# Altium PCB Molex_Programming_Adapter.PcbDoc
Units mm, origin at the board's own origin, x right, y up, seen from the top; angles counter-clockwise.
Board outline 47.6 x 24.89 mm, 2 copper layers (Top Layer, Bottom Layer); 12 components, 10 nets, 51 pads, 21 vias.
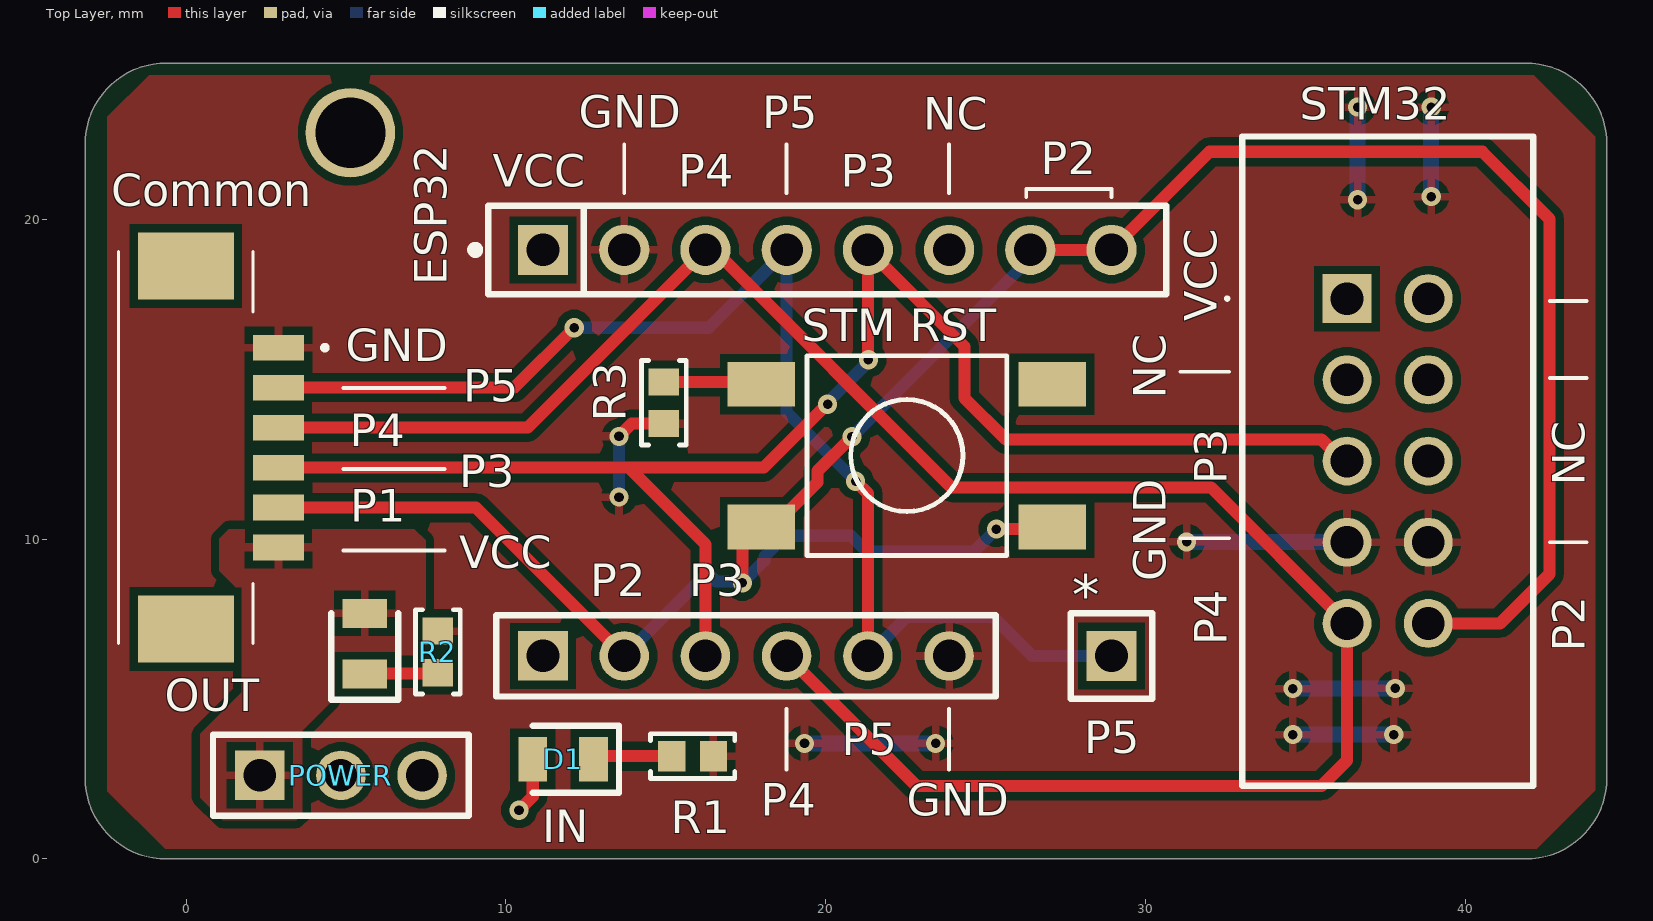
[diagram p0: Top Layer view]
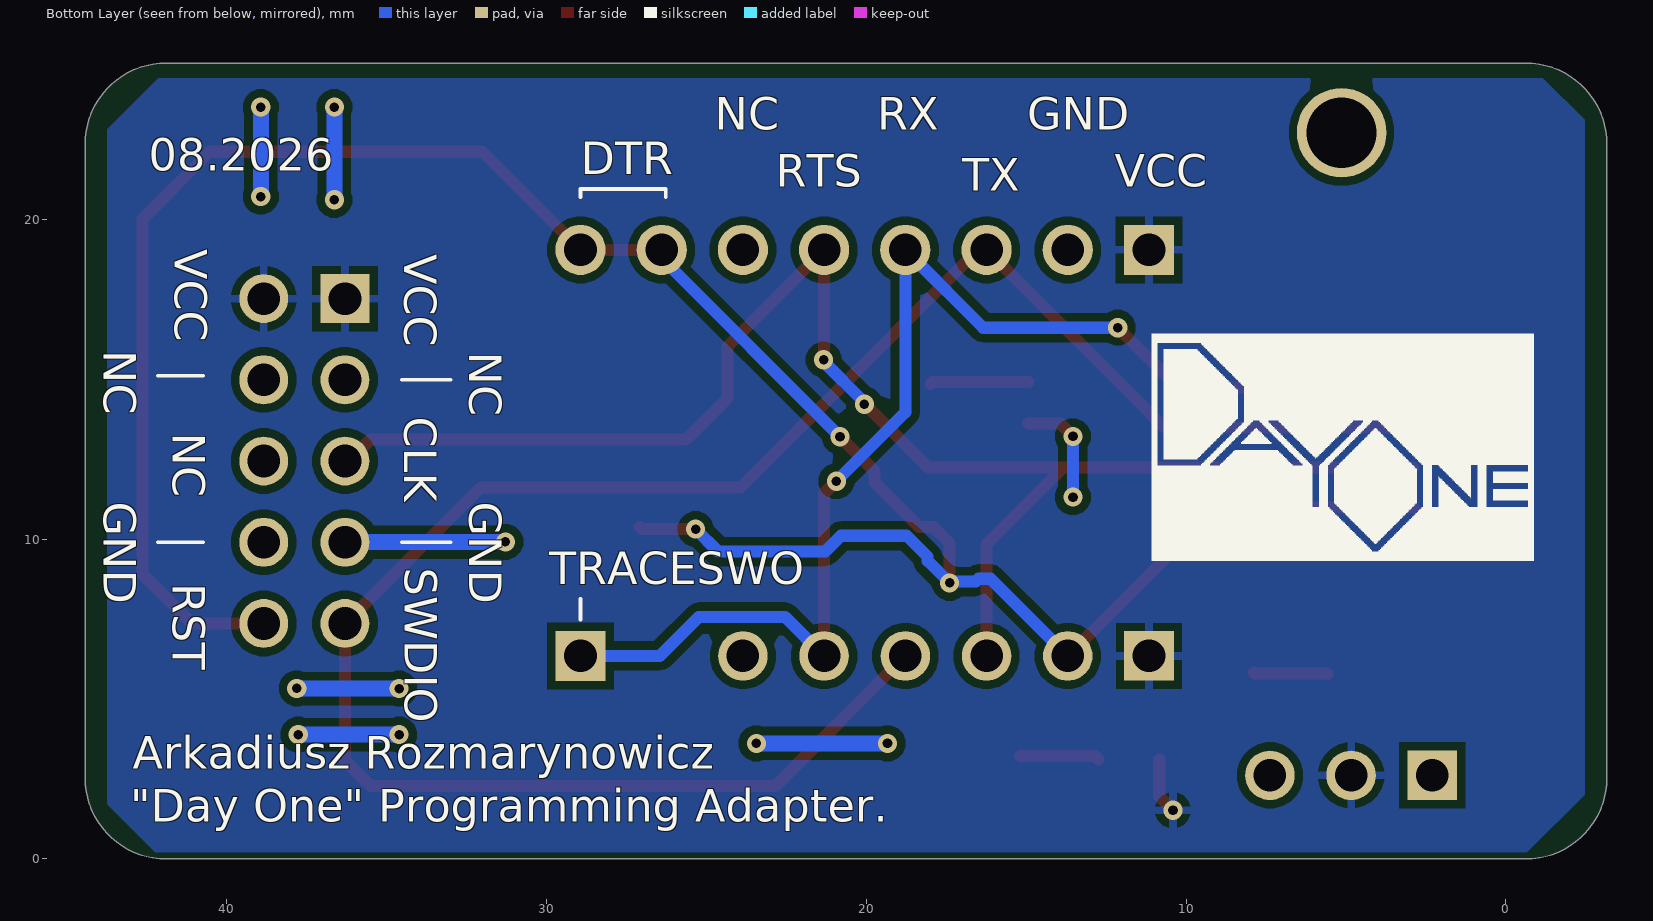
[diagram p1: Bottom Layer view, seen from below]
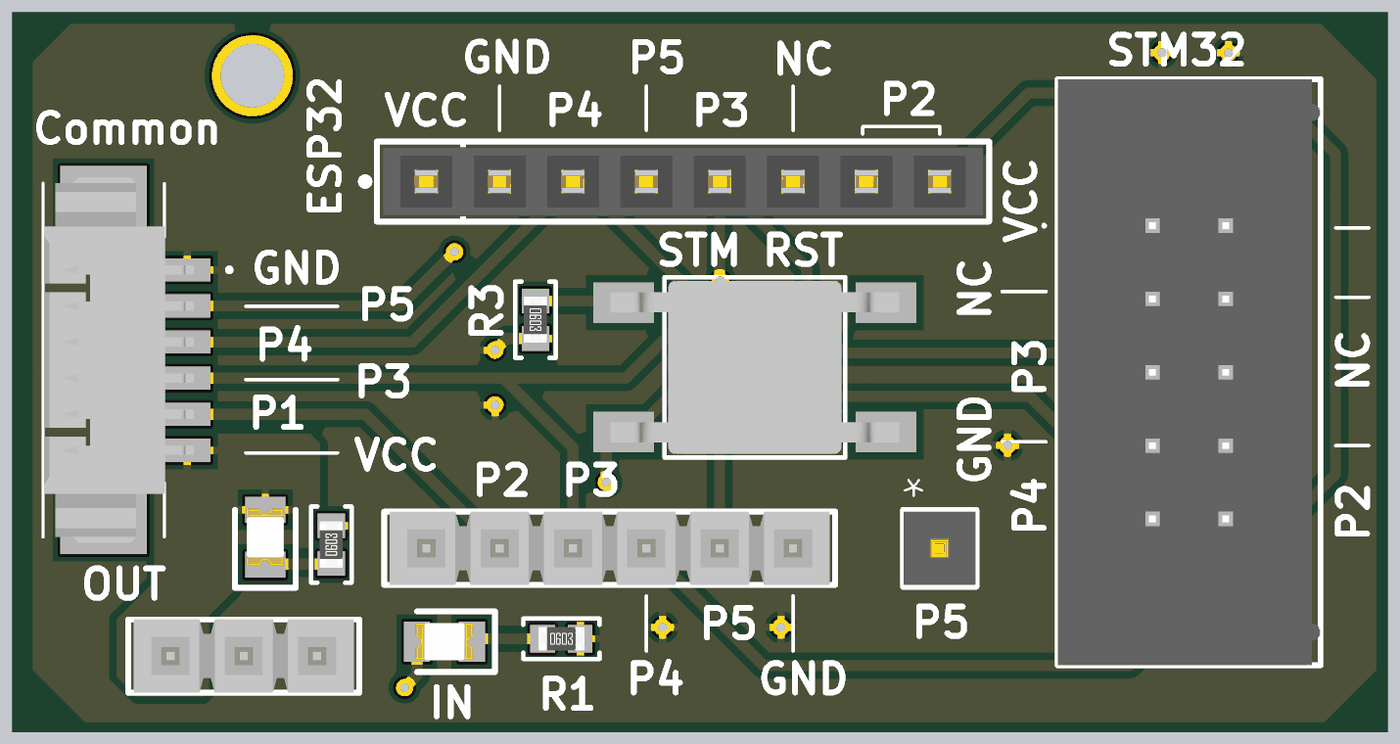
[diagram p2: 3D render of the assembled board from above, using the file's embedded part models]

## Layer stack, top to bottom
Top Solder: solder mask 0.0102, Solder Resist, Dk 3.5
Top Layer: signal copper 0.0356
Dielectric 1: dielectric 0.32, FR-4, Dk 4.8
Bottom Layer: signal copper 0.0356
Bottom Solder: solder mask 0.0102, Solder Resist, Dk 3.5

## Board outline
-0.618,24.892 ccw(c-0.618,22.352) -3.158,22.352 -3.158,2.54 ccw(c-0.618,2.54) -0.618,0 5.842,0 41.898,0 ccw(c41.898,2.54) 44.438,2.54 44.438,22.352 ccw(c41.898,22.352) 41.898,24.892 20.816,24.892

## Design rules (kind name [scope] priority, off if disabled: settings)
Clearance [All] p1: gap=0.254 ignorepadtopadclearanceinfootprint=FALSE
PolygonConnect [All] p1: connectstyle=Relief reliefconductorwidth=0.254 reliefentries=4 polygonreliefangle="90 Angle" airgapwidth=0.254
RoutingVias [All] p1: holewidth=0.3 width=0.6 viastyle="Through Hole" minholewidth=0.2 minwidth=0.45 maxholewidth=0.3 maxwidth=0.7
SolderMaskExpansion [All] p1: expansion=0.102 istentingtop=FALSE
SupplyNets "Schematic Supply Nets_2" [InNet('VCC_OUT')] p1: voltage=0.000
SupplyNets "Schematic Supply Nets_1" [InNet('GND')] p2: voltage=0.000
SupplyNets "Schematic Supply Nets" [InNet('VCC')] p3: voltage=0.000
Width [All] p1: maxlimit=0.5 minlimit=0.254 preferedwidth=0.381
30 further rules are at their usual default settings.

## Components (designator, comment, footprint, x,y, rotation, side; value= is the part's Value field where it differs from the comment)
Common "53261-0671" 532610671 -0.008,12.867 r270 top (schematic designator J3)
D1 "LS_R976" LEDC2012X40N 11.792,3.116 r180 top
ESP32 "8 Pin Female Header" FP-RS1-08-G-MFG 20.054,19.05 r0 top (schematic designator J2)
OUT "LS_R976" LEDC2012X40N 5.588,6.731 r90 top (schematic designator D2)
P1 "6 Pin Male Header" SMTC-TSW-106-23-X-S 11.164,6.35 r0 top
P5 "Male Header" FP-HTSW-101-07-L-S-MFG 28.944,6.35 r270 top (schematic designator J1)
POWER "TSW-103-07-T-S" SMTC-TSW-103-07-X-S 2.302,2.616 r0 top (schematic designator S1)
R1 "120R" Res_0603_Medium_Density 15.842,3.216 r0 top
R2 "120R" Res_0603_Medium_Density 7.874,6.477 r90 top
R3 "220R" Res_0603_Medium_Density 14.942,14.266 r270 top
STM32 "STM32 IDC" DS101310SSIB1B0 36.31,17.526 r270 top (schematic designator J4)
"STM RST" "Keyboard_B1_Switch" SW4_FSM-5P23_TEC 22.542,12.616 r180 top (schematic designator SW1)

## Footprints (in the part's own frame and the unit in brackets; to place one, negate y for a bottom-side part, rotate by r counter-clockwise, add the part's x,y. Pads: shape width x height; smd on the part's side, far side on the other; paste and mask are expansions set on the pad)
532610671 [mm]
  rect 0.8x1.6 smd: 1(-3.125,2.9) 2(-1.875,2.9) 3(-0.625,2.9) 4(0.625,2.9) 5(1.875,2.9) 6(3.125,2.9)
  rect 2.1x3 smd: MP1(-5.675,0) MP2(5.675,0)
  silkscreen extent -6.12,-2.1 6.12,4.4, body extent -6.32,-2.07 6.32,3.13, height 3.4
DS101310SSIB1B0 [mm]
  rect 1.53x1.53 hole 1.02: 1(0,0)
  round 1.53 hole 1.02: 2(0,2.54) 3(2.54,0) 4(2.54,2.54) 5(5.08,0) 6(5.08,2.54) 7(7.62,0) 8(7.62,2.54) 9(10.16,0) 10(10.16,2.54)
  silkscreen extent -5.07,-3.8 15.23,5.82, body extent -5.07,-3.28 15.23,5.82, height 8.8
FP-HTSW-101-07-L-S-MFG [mm]
  rect 1.57x1.57 hole 1.02 paste-2539.97 mask+0: 1(0,0)
  silkscreen extent -1.33,-1.27 1.33,1.27, body extent -1.43,-1.37 1.43,1.37, height 0.25
FP-RS1-08-G-MFG [mm]
  rect 1.57x1.57 hole 1.02 paste-2539.97 mask+0: 1(-8.89,0)
  round 1.57 hole 1.02 paste-2539.97 mask+0: 2(-6.35,0) 3(-3.81,0) 4(-1.27,0) 5(1.27,0) 6(3.81,0) 7(6.35,0) 8(8.89,0)
  silkscreen extent -11.13,-1.38 10.6,1.38, body extent -10.7,-1.48 10.7,1.48, height 0.25
LEDC2012X40N [mm]
  rect 0.9x1.4 smd: 1(-0.95,0) 2(0.95,0)
  silkscreen extent -1.75,-1.05 0.95,1.05, body extent -1,-0.65 1,0.65, height 0.8
Res_0603_Medium_Density [mm] "Chip Resistor, 0603, 2-Leads, Body 1.60x0.80mm, IPC Medium Density"
  rect 0.85x0.95 smd: 1(-0.65,0) 2(0.65,0)
  silkscreen extent -1.32,-0.7 1.32,0.7, body extent -0.8,-0.4 0.8,0.4, height 0.45
SMTC-TSW-103-07-X-S [mm] ".025 SQ Post Terminal Strip Assembly, 1x3 Pins, Vertical, 2.54mm Pitch, Male"
  rect 1.55x1.55 hole 1.02: 1(0,0)
  round 1.55 hole 1.02: 2(2.54,0) 3(5.08,0)
  silkscreen extent -1.46,-1.27 6.54,1.27, body extent -1.27,-1.27 6.35,1.27, height 8.38
SMTC-TSW-106-23-X-S [mm] ".025 SQ Post Terminal Strip Assembly, 1x6 Pins, Vertical, 2.54mm Pitch, Male"
  rect 1.55x1.55 hole 1.02: 1(0,0)
  round 1.55 hole 1.02: 2(2.54,0) 3(5.08,0) 4(7.62,0) 5(10.16,0) 6(12.7,0)
  silkscreen extent -1.46,-1.27 14.16,1.27, body extent -1.27,-1.27 13.97,1.27, height 8.38
SW4_FSM-5P23_TEC [mil]
  rect 83x55 smd paste+0 mask+0: 1(-179,88) 2(179,88) 3(-179,-88) 4(179,-88)
  silkscreen extent -123,-123 123,123, body extent -197,-118 197,118, height 199

## Part data
Common: "1.25mm Pitch, PicoBlade PCB Header, Single Row, Right-Angle, Surface Mount, Tin (Sn) Plating, Friction Lock,  Circuits, Tape and Reel", Manufacturer_Name=Molex, Mouser Part Number=538-53261-0671, Arrow Part Number=53261-0671, Arrow Price/Stock=https://www.arrow.com/en/products/53261-0671/molex?region=nac, Datasheet Link=https://www.molex.com/pdm_docs/sd/532610671_sd.pdf, Geometry.Height=3.6mm, Manufacturer_Part_Number=53261-0671, Mouser Price/Stock=https://www.mouser.co.uk/ProductDetail/Molex/53261-0671?qs=%252B72YyncTwW9Wyr77z4J2cA%3D%3D
D1 OUT: "Red 0805 CHIPLED LS R976N-R102 Osram Opto LS R976, CHIPLED 0805 Series Red LED, 633 nm, 2012 (0805), Rectangle Lens SMD Package", Manufacturer_Name="ams OSRAM", Manufacturer_Part_Number="LS R976", Mouser Part Number=720-LSR976D5178, Datasheet Link=http://uk.rs-online.com/web/p/products/4974804, Geometry.Height=0.4mm, Mouser Price/Stock=https://www.mouser.co.uk/ProductDetail/OSRAM-Opto-Semiconductors/LS-R976?qs=OIr7YF%252B2cWVTfzKl425Fkw%3D%3D, Part Number="LS R976", Supplier=Mouser
ESP32: library part CMP-02275-20083808-1, "RS1-08-G Connector, receptacle strip, 8 position, 2.54MM pitch, single row", Current Rating=3A, Max Operating Temperature=105°C, Min Operating Temperature=-40°C, Contact Gender=Female, Contact Material="Gold, Nickel", Height=8.89mm, NexarPartId=20083808, Number of Contacts=8, Number of Rows=1, Pitch=2.54mm, RoHS=Compliant, Schedule B="8536694040, 8536694040", Termination=PCB
P1: library part CMP-1024-00398-1, "0.025\" SQ Post Header, Through-hole, Vertical, -55 to 125 degC, 2.54 mm Pitch, 6-Pin, Male, RoHS", Manufacturer=Samtec, PartNumber=TSW-106-23-F-S, Temperature Range="-55 to 125 degC", ComponentLink1Description="Manufacturer URL", ComponentLink1URL=http://www.samtec.com, ComponentLink2Description=Datasheet, ComponentLink2URL=http://www.samtec.com/documents/webfiles/pdf/TSW_TH.PDF, ComponentLink3Description="Package Specification", ComponentLink3URL=http://www.samtec.com/documents/webfiles/cpdf/TSW-XXX-XX-XXX-X-XX-XXX-MKT.pdf, DatasheetVersion=F-214, Mounting Technology=Through-hole, Orientation=Vertical, PackageDescription=".025[0.64] SQ. Post Terminal Strip Assembly", PackageReference=TSW-106-23-X-S, PackageVersion="DM, 8/1988", Pitch="2.54 mm", RoHS=True
P5: library part CMP-02766-001464-1, "CONN HEADER VERT 1POS", Housing Color=Natural, Max Current Rating=7.6A, Max Operating Temperature=125°C, Max Voltage Rating (AC)=550V, Min Operating Temperature=-55°C, Contact Material=Bronze, Contact Plating=Gold, Depth=2.48mm, Gender=Male, Housing Material=Polymer, Length=2.54mm, Number of Contacts=1, Number of Rows=1, Orientation=Straight, Packaging=Bulk, Radiation Hardening=No, REACH SVHC="No SVHC", RoHS Compliant=Yes, Termination=Solder
POWER: library part CMP-1024-00332-1, "0.025\" SQ Post Header, Through-hole, Vertical, -55 to 105 degC, 2.54 mm Pitch, 3-Pin, Male, RoHS", Manufacturer=Samtec, Temperature Range="-55 to 105 degC", ComponentLink1Description="Manufacturer URL", ComponentLink1URL=http://www.samtec.com, ComponentLink2Description=Datasheet, ComponentLink2URL=http://www.samtec.com/documents/webfiles/pdf/TSW_TH.PDF, ComponentLink3Description="Package Specification", ComponentLink3URL=http://www.samtec.com/documents/webfiles/cpdf/TSW-XXX-XX-XXX-X-XX-XXX-MKT.pdf, DatasheetVersion=F-214, Mounting Technology=Through-hole, Orientation=Vertical, PackageDescription=".025[0.64] SQ. Post Terminal Strip Assembly", PackageReference=TSW-103-07-X-S, PackageVersion="DM, 8/1988", PartNumber=TSW-103-07-T-S, Pitch="2.54 mm", RoHS=True
R1 R2: library part Resistor_SMD, Package=0603, Part Number=CR0603-JW-121ELF, ComponentLink1Description="Online Store Link", Supplier=Mouser
R3: library part Resistor_SMD, Package=0603, Part Number=CR0603-JW-221ELF, ComponentLink1Description="Online Store Link", Supplier=Mouser
STM32: library part DS1013-10SSIB1-B-0, "Socket; IDC; male; PIN: 10; straight; THT; gold-plated; 2.54mm", Manufacturer_Name=Connfly, Datasheet Link=https://www.tme.eu/Document/c6e6da985bd9c519d97c4924b5c8a047/DS1013.pdf, Geometry.Height=9.48mm, Manufacturer_Part_Number=DS1013-10SSIB1-B-0
"STM RST": library part 1571563-4, "FSM4JSMAATR=TACTSWITCH,SMT,T&R", Manufacturer_Name="TE Connectivity", Copyright="Copyright (C) 2025 Ultra Librarian. All rights reserved.", Manufacturer_Part_Number=1571563-4, RefDes=RefDes, Type=Type

## Free pads (board coordinates)
  round 2.8 hole 2.2 unplated: 2(5.142,22.716)

## Via types
v1: diameter 0.6, hole 0.3, Top Layer to Bottom Layer, 21 vias

## Nets (pads, with @x,y where several pads share a name; then routed paths per layer and width w, separated by ;. In a path a pad name is that pad's centre, name@x,y a point inside that pad or via, vN(x,y) a via of type N, cw(c..) or ccw(c..) an arc to the next point about the centre after c; other vN are vias at no path point)
GND: Common.1 ESP32.2 P1.6 R1.2 R2.2 R3.2 STM32.7 STM32.8 | length 24.2
  Top Layer w0.381: v1(13.542,13.216) 13.942,13.616 R3.2
  Bottom Layer w0.381: v1(13.542,11.316) v1(13.542,13.216) ; v1@37.809,5.328 v1(37.816,5.335)
  Bottom Layer w0.5: v1(19.342,3.616) v1(23.442,3.616) ; v1(31.293,9.917) 31.305,9.906 STM32.7 ; v1(34.615,3.889) v1(37.769,3.889) ; v1(34.615,5.328) v1@37.809,5.328 ; v1(36.642,20.616) v1@36.642,23.316 ; v1(38.942,20.716) v1@38.942,23.316
  other v1: 36.642,23.516 38.942,23.516
NetD1_1: D1.1 R1.1 | length 2.5
  Top Layer w0.381: D1.1 12.842,3.216 R1.1
NetD2_1: OUT.1 R2.1 | length 2.3
  Top Layer w0.381: OUT.1 5.611,5.804 7.851,5.804 R2.1
NetR3_1: "STM RST.4" R3.1 | length 3.1
  Top Layer w0.381: R3.1 17.931,14.916 17.996,14.851
P2: "STM RST.1" "STM RST.2" Common.5 ESP32.7 ESP32.8 P1.2 STM32.10 | length 76.7
  Top Layer w0.381: Common.5 9.062,10.992 P1.2 ; v1(17.399,8.636) 17.399,9.873 17.907,10.381 18.351,10.381 19.752,11.781 19.752,12.132 v1(20.828,13.208) ; v1(25.342,10.316) 27.024,10.316 27.089,10.381 ; ESP32.7 ESP32.8 32.01,22.116 40.542,22.116 42.642,20.016 42.642,8.916 41.092,7.366 STM32.10
  Bottom Layer w0.381: P1.2 16.117,8.763 16.498,8.763 16.583,8.678 17.357,8.678 v1(17.399,8.636) 18.086,9.323 18.086,9.45 18.744,10.108 20.796,10.108 21.288,9.616 24.642,9.616 v1(25.342,10.316) ; v1(20.828,13.208) 26.404,18.784 ESP32.7
P3: Common.4 ESP32.5 P1.3 STM32.5 | length 48.9
  Top Layer w0.381: Common.4 13.842,12.242 ; P1.3 16.244,9.84 13.842,12.242 ; v1(20.066,14.224) 20.05,14.224 18.068,12.242 13.842,12.242 ; v1(21.342,15.616) 21.324,15.634 21.324,18.432 ESP32.5 24.342,16.032 24.342,14.416 25.642,13.116 35.512,13.116 36.182,12.446 STM32.5
  Bottom Layer w0.381: v1(20.066,14.224) 20.066,14.282 21.342,15.558 v1(21.342,15.616)
P4: Common.3 ESP32.3 P1.4 STM32.9 | length 64.4
  Top Layer w0.381: Common.3 10.686,13.492 ESP32.3 16.508,19.05 23.942,11.616 32.06,11.616 STM32.9 36.31,3.084 35.512,2.286 22.848,2.286 P1.4
P5: Common.2 ESP32.4 P1.5 P5.1 | length 40
  Top Layer w0.381: Common.2 10.268,14.742 v1(12.142,16.616) ; v1(20.942,11.816) 21.324,11.434 P1.5
  Bottom Layer w0.381: v1(12.142,16.616) 16.35,16.616 ESP32.4@18.607,18.873 ; ESP32.4 ESP32.4@18.607,18.873 ; v1(20.942,11.816) 18.784,13.974 18.784,18.696 ESP32.4@18.607,18.873 ; P1.5 22.544,7.57 25.245,7.57 26.464,6.35 P5.1
VCC: D1.2 ESP32.1 P1.1 POWER.2 STM32.1 STM32.2 | length 1.8
  Top Layer w0.381: v1(10.414,1.524) 10.842,1.952 D1.2
VCC_OUT: Common.6 OUT.2 POWER.1
pads on no net: "STM RST.3" Common.MP1 Common.MP2 ESP32.6 POWER.3 STM32.3 STM32.4 STM32.6

## Polygon pours and split planes (outlines as drawn)
GND on Top Layer "GND_L01_P001" (solid, pour order 1): -2.458,23.216 -1.158,24.516 42.142,24.516 44.069,22.589 44.069,2.143 42.242,0.316 -0.658,0.316 -2.458,2.116
VCC_OUT on Top Layer "VCC_OUT_L01_P000" (solid, pour order 0): 1.742,8.316 1.042,9.016 1.042,10.016 1.342,10.316 7.142,10.316 7.493,9.965 7.493,6.567 7.296,6.37 5.996,6.37 3.642,4.016 3.642,1.416 3.442,1.216 1.142,1.216 0.442,1.916 0.442,3.916 1.742,5.216
VCC on Bottom Layer "VCC_L02_P002" (solid, pour order 2): -2.458,23.116 -1.158,24.416 42.142,24.416 43.742,22.816 43.742,1.716 42.242,0.216 -0.658,0.216 -2.458,2.016

## Silkscreen, mask and mechanical layers (free items; w line width, h text height)
Top Overlay:
  lines w0.12: 4.916,9.652 8.091,9.652 ; 4.916,12.192 8.091,12.192 ; 4.916,14.732 8.091,14.732 ; 13.704,20.828 13.704,22.352 ; 18.784,2.794 18.784,4.699 ; 18.784,20.828 18.784,22.352 ; 23.864,2.794 23.864,4.699 ; 23.864,20.828 23.864,22.352 ; 26.277,20.701 26.277,20.955 ; 28.944,20.701 28.944,20.955 ; 31.103,10.033 32.627,10.033 ; 31.103,15.24 32.627,15.24 ; 42.66,9.906 43.803,9.906 ; 42.66,15.046 43.803,15.046 ; 42.66,17.446 43.803,17.446 ; 26.277,20.955 28.944,20.955 ; 26.277,20.955 28.944,20.955
  text "GND" at 12.281,22.87 h1.02
  text "P5" at 18.022,22.86 h1.02
  text "NC" at 23.051,22.809 h1.02
  text "P2" at 26.734,21.412 h1.02
  text "VCC" at 9.589,21.031 h1.02
  text "P4" at 15.398,21.031 h1.02
  text "P3" at 20.478,21.031 h1.02
  text "VCC" at 32.239,16.819 h1.02 r90
  text "GND" at 4.992,15.57 h1.02
  text "NC" at 30.646,14.394 h1.02 r90
  text "P5" at 8.675,14.3 h1.02
  text "P4" at 5.119,12.903 h1.02
  text "P3" at 32.551,11.727 h1.02 r90
  text "NC" at 43.751,11.68 h1.02 r90
  text "P3" at 8.548,11.633 h1.02
  text "VCC" at 8.548,9.093 h1.02
  text "GND" at 30.646,8.679 h1.02 r90
  text "P2" at 12.645,8.219 h1.02
  text "P3" at 15.745,8.219 h1.02
  text "P4" at 32.551,6.68 h1.02 r90
  text "P2" at 43.751,6.48 h1.02 r90
  text "P5" at 20.511,3.251 h1.02
  text "P4" at 17.971,1.346 h1.02
  text "GND" at 22.543,1.346 h1.02
  text "IN" at 11.145,0.519 h1.02
Bottom Overlay:
  drawing of 12 lines, arcs and shapes, not listed
  text "GND" at 14.965,22.809 h1.02
  text "RX" at 19.664,22.809 h1.02
  text "NC" at 24.744,22.809 h1.02
  text "08.2026" at 42.439,21.519 h1.02
  text "DTR" at 28.935,21.412 h1.02
  text "VCC" at 12.231,21.031 h1.02
  text "RTS" at 22.839,21.031 h1.02
  text "TX" at 16.997,20.904 h1.02
  text "VCC" at 41.639,19.07 h1.02 r90
  text "VCC" at 34.456,18.914 h1.02 r90
  text "NC" at 43.854,15.908 h1.02 r90
  text "NC" at 32.424,15.866 h1.02 r90
  text "CLK" at 34.456,13.834 h1.02 r90
  text "NC" at 41.695,13.326 h1.02 r90
  text "GND" at 32.424,11.167 h1.02 r90
  text "GND" at 43.854,11.167 h1.02 r90
  text "SWDIO" at 34.439,9.101 h1.02 r90
  text "RST" at 41.695,8.627 h1.02 r90
  text "TRACESWO" at 29.917,8.585 h1.02
  text "Arkadiusz Rozmarynowicz" at 42.953,2.828 h1.02
  text "\"Day One\" Programming Adapter." at 43.023,1.158 h1.02

## Text inside footprints (layer, text, board x,y; h text height)
"STM RST": Top 3D Body "*" at 25.476,11.257 h1.27 r180; Top Overlay "*" at 28.575,9.441 h1.27 r180